# Altium PCB MEMS_V3_PCB.PcbDoc
Units mm, origin at the board's own origin, x right, y up, seen from the top; angles counter-clockwise.
Board outline 40.4 x 45.06 mm, 2 copper layers (Top Layer, Bottom Layer), stack 0.695 mm thick; 29 components, 20 nets, 79 pads, 342 vias.
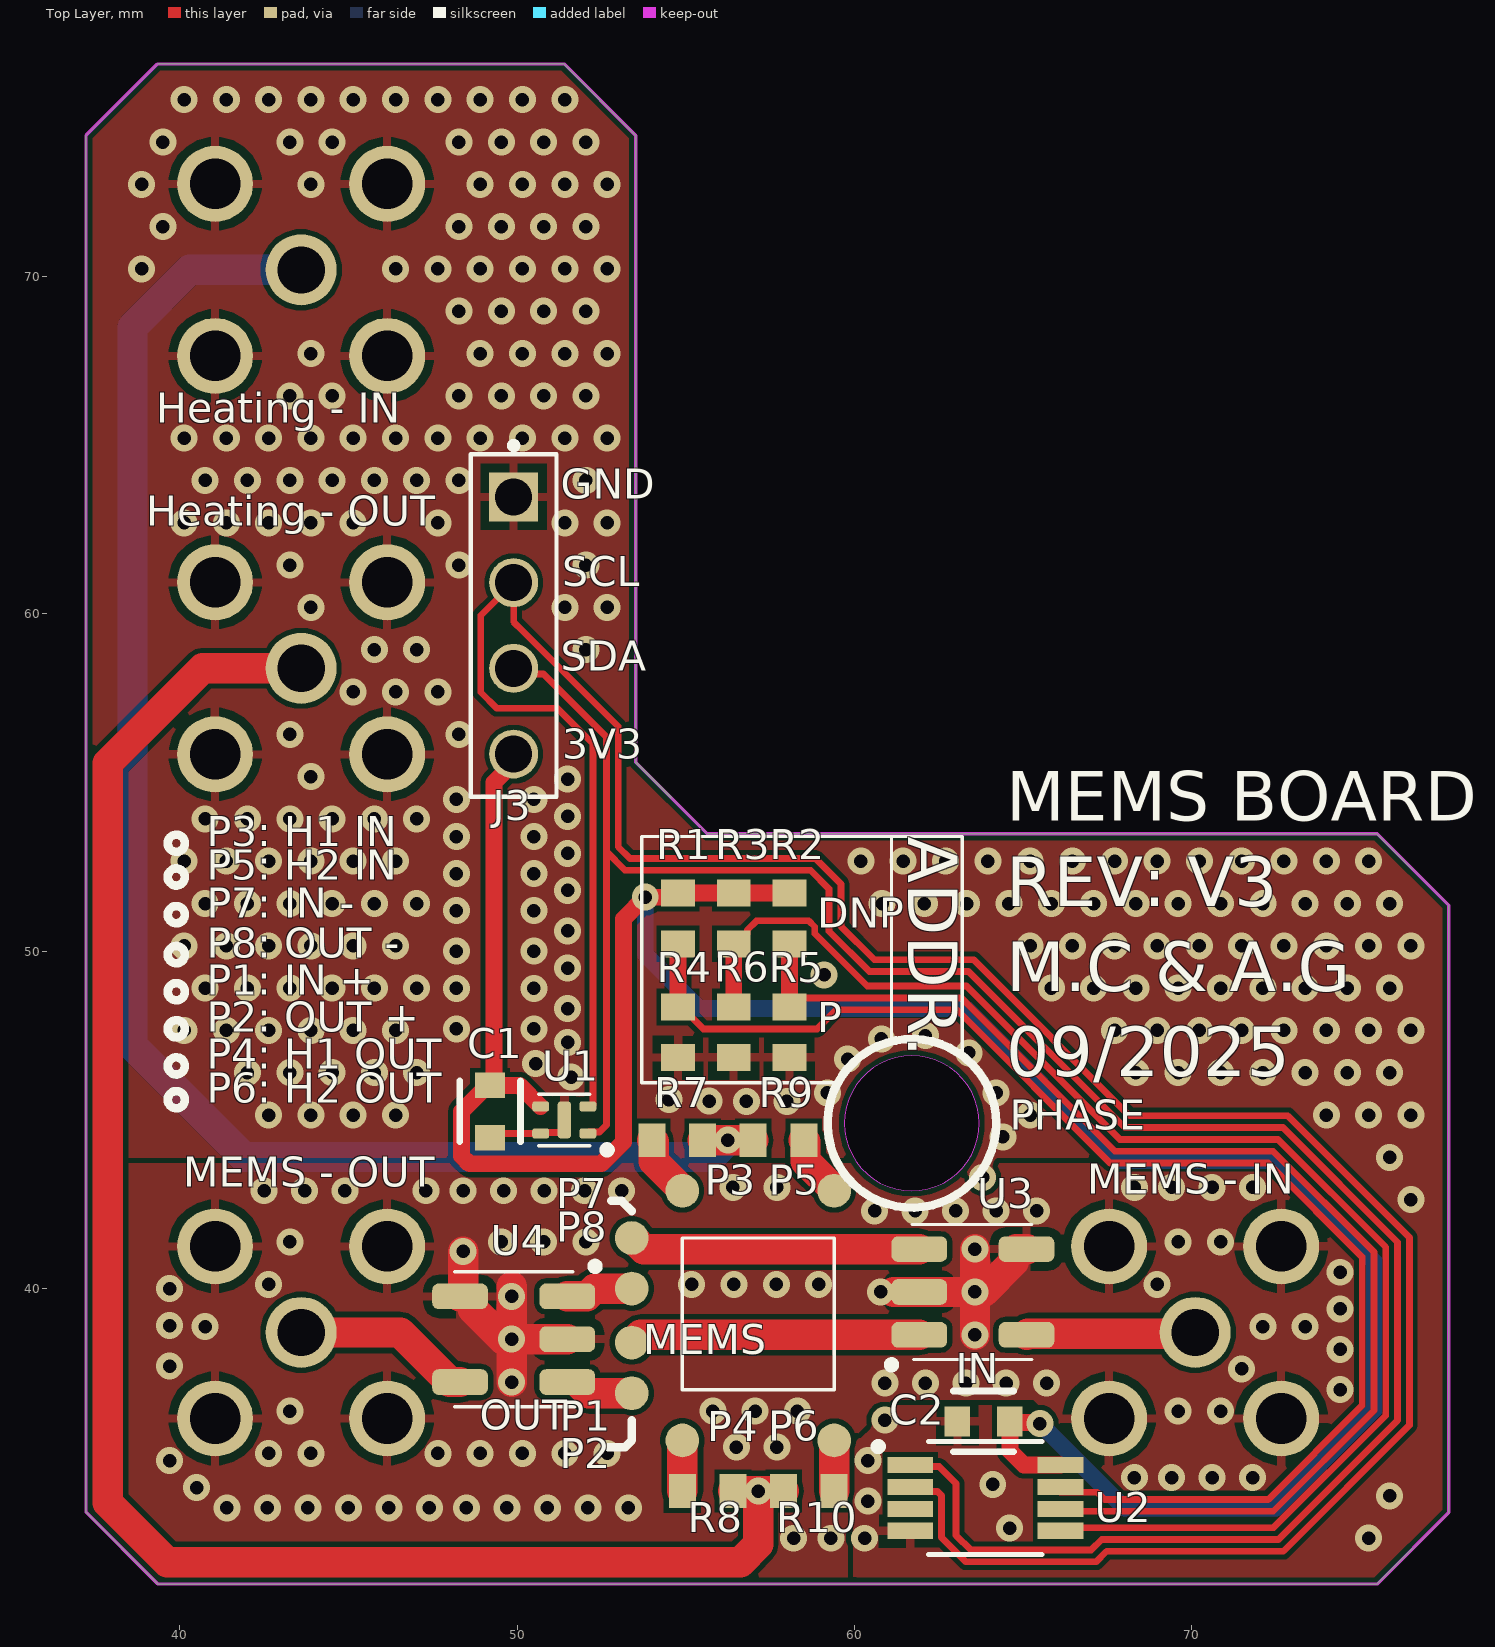
[diagram p0: Top Layer view]
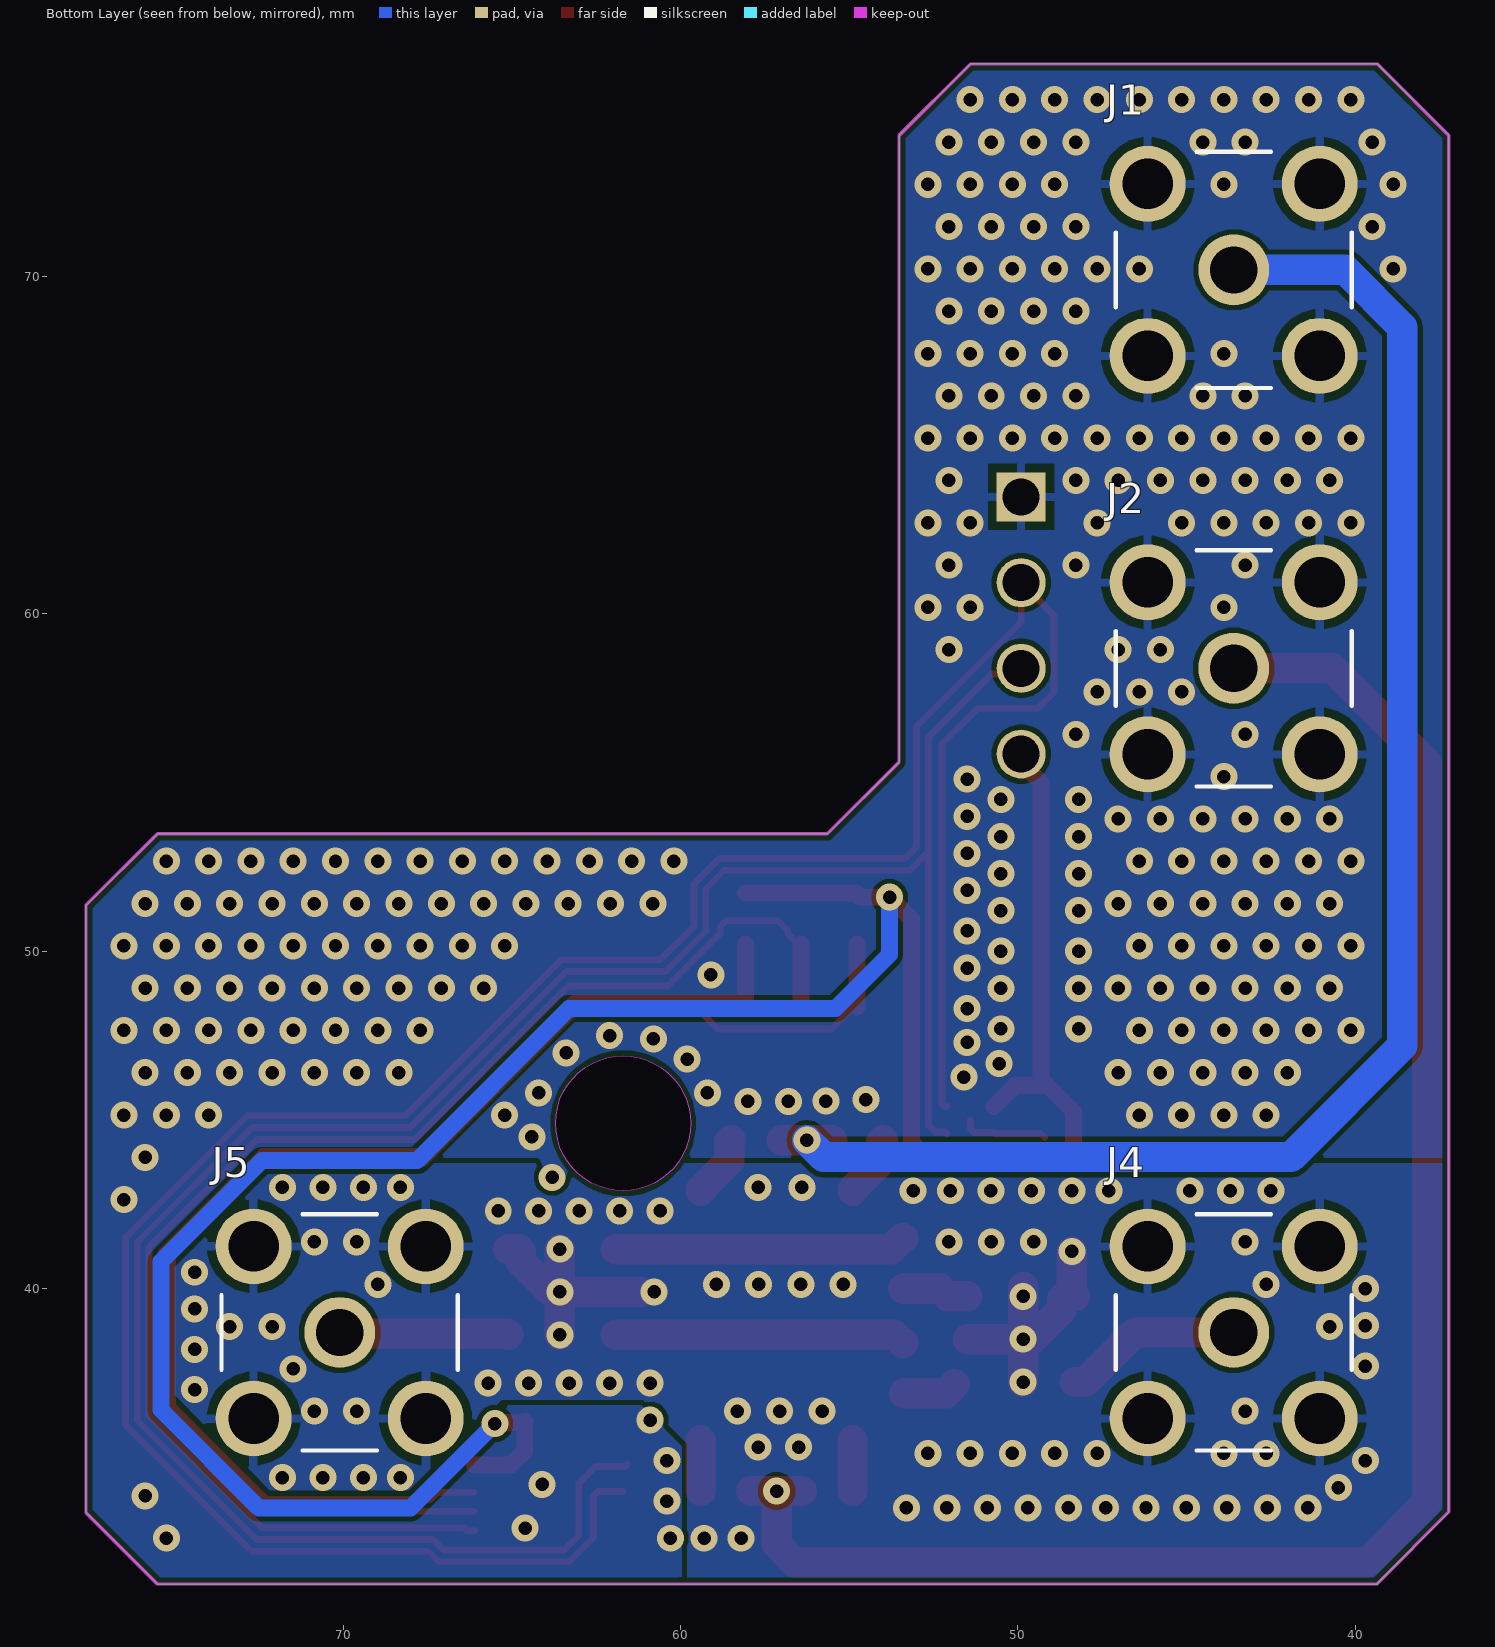
[diagram p1: Bottom Layer view, seen from below]
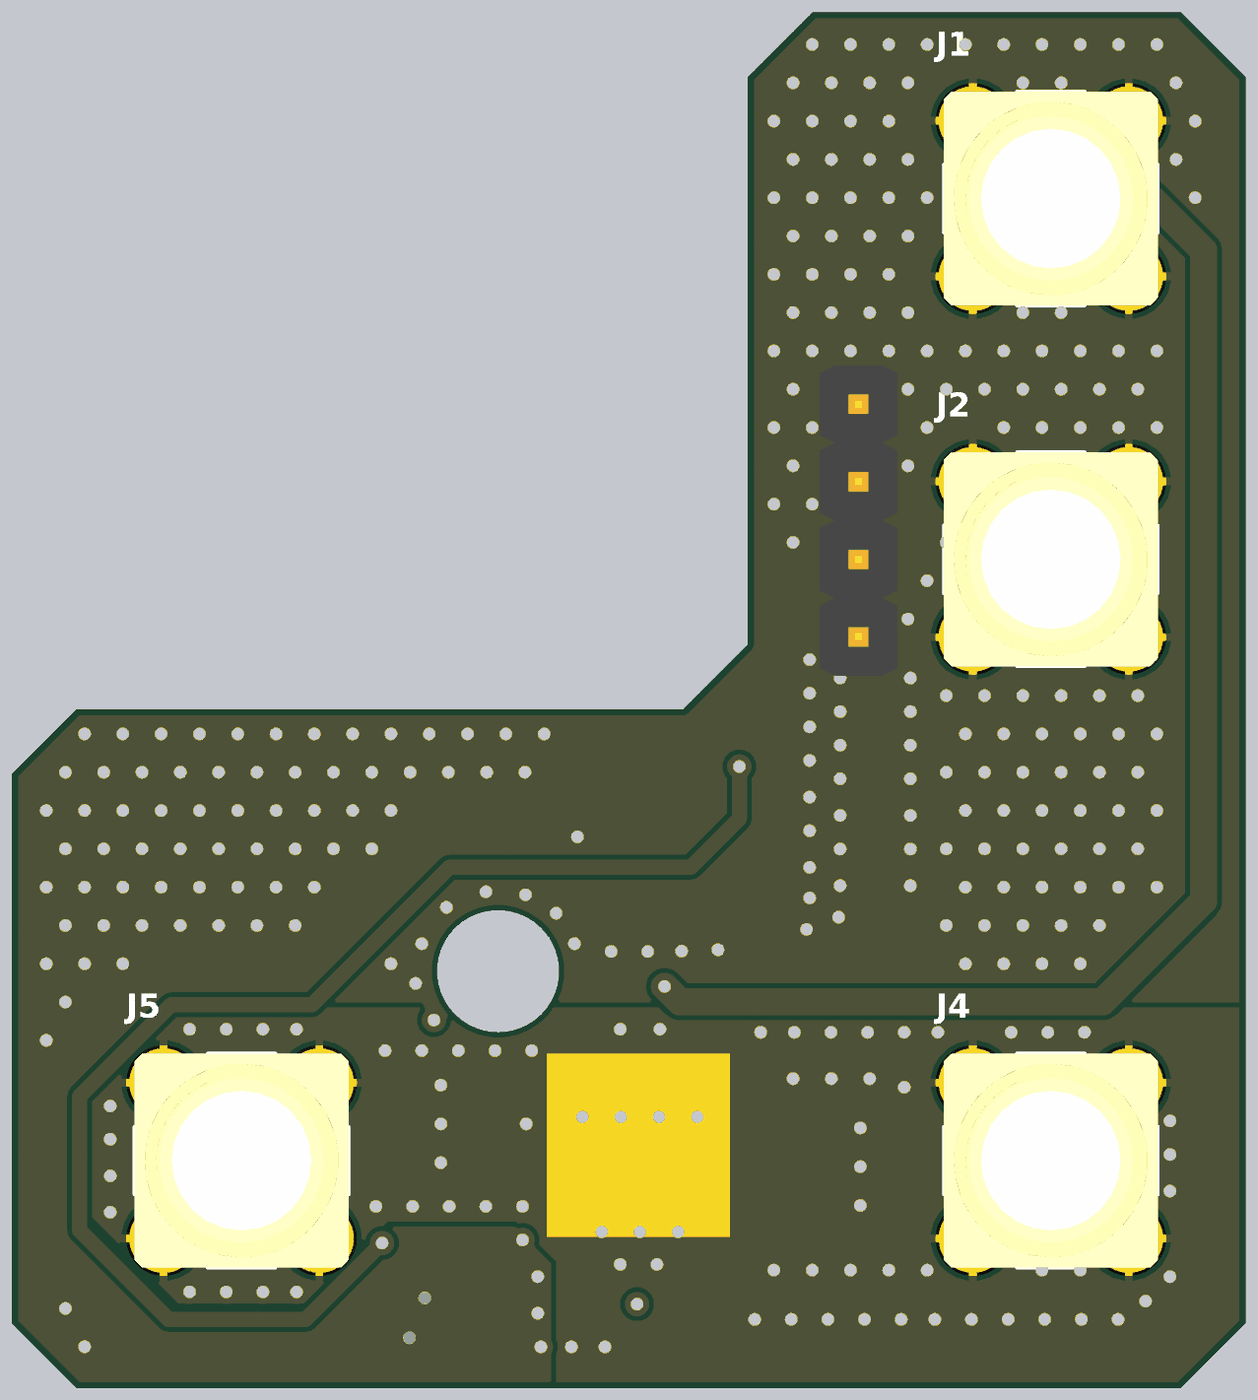
[diagram p2: 3D render of the assembled board from below, using the file's embedded part models]

## Layer stack, top to bottom
Top Solder: solder mask 0.0102, Solder Resist, Dk 3.5
Top Layer: signal copper 0.0152
Dielectric 1: dielectric 0.665, FR-4, Dk 4.8
Bottom Layer: signal copper 0.0152
Bottom Solder: solder mask 0.0102, Solder Resist, Dk 3.5

## Board outline
37.221,33.379 37.221,74.179 39.343,76.3 51.4,76.3 53.521,74.179 53.521,55.6 55.643,53.479 75.5,53.479 77.621,51.357 77.621,33.363 75.5,31.242 39.343,31.242 39.343,31.258
cut-out: 59.7,44.9 ccw(c61.7,44.9) 61.7,42.9 ccw(c61.7,44.9) 63.7,44.9 ccw(c61.7,44.9) 61.7,46.9 ccw(c61.7,44.9)

## Design rules (kind name [scope] priority, off if disabled: settings)
Clearance [All] p1: gap=0.15 ignorepadtopadclearanceinfootprint=FALSE
MinimumSolderMaskSliver [All] p1 off: minsoldermaskwidth=0.254
PolygonConnect [All] p1: thpad.connectstyle=Relief thpad.reliefconductorwidth=0.254 thpad.reliefentries=4 thpad.polygonreliefangle="90 Angle" thpad.airgapwidth=0.254 smdpad.connectstyle=Relief smdpad.reliefconductorwidth=0.254 smdpad.reliefentries=4 smdpad.polygonreliefangle="90 Angle" smdpad.airgapwidth=0.254 via.connectstyle=Direct via.reliefconductorwidth=0.254 via.reliefentries=4 via.polygonreliefangle="90 Angle" via.airgapwidth=0.254
RoutingVias [All] p1: holewidth=0.3 width=0.6 viastyle="Through Hole" minholewidth=0.2 minwidth=0.5 maxholewidth=0.711 maxwidth=1.27
SilkToSilkClearance [All] p1 off: silktosilkclearance=0.254
SilkToSolderMaskClearance [IsPad] p1 off: minsilkscreentomaskgap=0.254 clearancetoexposedcopper=TRUE
SolderMaskExpansion [All] p1: expansion=0.102 istentingtop=FALSE
SupplyNets "Schematic Supply Nets_1" [InNet('AGND')] p1: voltage=0.000
SupplyNets "Schematic Supply Nets_2" [InNet('GND')] p2: voltage=0.000
SupplyNets "Schematic Supply Nets" [InNet('3V3')] p3: voltage=0.000
Width [(InNet('MEMS_IN') OR InNet('MEMS_OUT') OR InNet('MEMS_IN_D_N') OR InNet('MEMS_IN_D_P') OR InNet('MEMS_OUT_D_N') OR InNet('MEMS_OUT_D_P'))] p1: maxlimit=1.154 minlimit=0.9 preferedwidth=1.154 impedanceprofiledriven=TRUE impedanceprofileid={71C03835-4AAD-4EFE-88B4-1C130F7F27B0} impedanceprofilevalue=50.000000 minimp=50.000000 maximp=50.000000 favimp=50.000000
Width Width_1 [All] p2: maxlimit=1 minlimit=0.1 preferedwidth=0.2
27 further rules are at their usual default settings.

## Components (designator, comment, footprint, x,y, rotation, side; value= is the part's Value field where it differs from the comment)
C1 "CL10E104KC8VPNC" C0603 49.2,45.25 r270 top value=100nF
C2 "CL10E104KC8VPNC" C0603 63.826,36.061 r180 top value=100nF
J1 "CONSMA001-G" CONSMA001-G 43.6,70.196 r180 bottom locked
J2 "CONSMA001-G" CONSMA001-G 43.6,58.385 r180 bottom locked
J3 "61300411121" WURTH_61300411121 49.9,59.655 r270 top
J4 "CONSMA001-G" CONSMA001-G 43.6,38.7 r180 bottom locked
J5 "CONSMA001-G" CONSMA001-G 70.1,38.7 r180 bottom locked
P1 "MEMS_PAD" MEMS_PAD 53.4,38.4 r0 top
P2 "MEMS_PAD" MEMS_PAD 53.4,36.9 r0 top
P3 "MEMS_PAD" MEMS_PAD 54.9,42.9 r0 top
P4 "MEMS_PAD" MEMS_PAD 54.9,35.5 r0 top
P5 "MEMS_PAD" MEMS_PAD 59.4,42.9 r0 top
P6 "MEMS_PAD" MEMS_PAD 59.4,35.5 r0 top
P7 "MEMS_PAD" MEMS_PAD 53.4,41.5 r0 top
P8 "MEMS_PAD" MEMS_PAD 53.4,40 r0 top
R1 "RMCF0603ZT0R00" R0603 54.771,50.971 r90 top value=0R
R2 "RMCF0603ZT0R00" R0603 58.073,50.971 r90 top value=0R
R3 "RMCF0603ZT0R00" R0603 56.422,50.971 r90 top value=0R
R4 "RMCF0603ZT0R00" R0603 54.771,47.596 r90 top value=0R
R5 "RMCF0603ZT0R00" R0603 58.073,47.596 r90 top value=0R
R6 "RMCF0603ZT0R00" R0603 56.422,47.596 r90 top value=0R
R7 "RMCF0603ZT0R00" R0603 54.75,44.4 r180 top value=0R
R8 "RMCF0603ZT0R00" R0603 55.65,34 r180 top value=0R
R9 "RMCF0603ZT0R00" R0603 57.75,44.4 r0 top value=0R
R10 "RMCF0603ZT0R00" R0603 58.65,34 r0 top value=0R
U1 "STS4L-AD1B-R3" STS4L-AD1B-R3 51.4,45 r180 top
U2 "P3T1755DPZ" TSSOP8_P3T1755DPZ_NXP 63.879,33.794 r0 top
U3 "TC1-1-13MX+" TC1-1-13MX+ 63.513,39.9 r90 top
U4 "TC1-1-13MX+" TC1-1-13MX+ 49.9,38.5 r270 top

## Footprints (in the part's own frame and the unit in brackets; to place one, negate y for a bottom-side part, rotate by r counter-clockwise, add the part's x,y. Pads: shape width x height; smd on the part's side, far side on the other; paste and mask are expansions set on the pad)
C0603 [mm]
  rect 0.75x0.9 smd paste+0 mask+0: 1(-0.775,0) 2(0.775,0)
  silkscreen extent -0.9,-0.9 0.9,0.9, body extent -1.25,-0.6 1.25,0.6, height 0.25
CONSMA001-G [mm]
  round 2.1 hole 1.4: 1(0,0)
  round 2.25 hole 1.5: S1(-2.55,2.55) S2(-2.55,-2.55) S3(2.55,-2.55) S4(2.55,2.55)
  silkscreen extent -3.5,-3.5 3.5,3.5, body extent -3.51,-3.51 3.51,3.51, height 9.78
MEMS_PAD [mm]
  round 1 smd: 1(0,0)
R0603 [mm]
  rect 0.8x1 smd: 1(-0.75,0) 2(0.75,0)
  body extent -0.85,-0.45 0.85,0.45, height 0.55
STS4L-AD1B-R3 [mm]
  rrect50% 0.5x0.3 smd: 1(-0.7,0.4) 2(-0.7,-0.4) 3(0.7,-0.4) 4(0.7,0.4)
  rrect50% 0.4x1.1 smd: THERM(0,0)
  silkscreen extent -1.37,-0.76 0.76,0.99, body extent -0.75,-0.75 0.75,0.75, height 0.55
TC1-1-13MX+ [mm]
  rrect50% 0.76x1.65 smd: 1(-1.27,1.59) 2(0,1.59) 3(1.27,1.59) 4(-1.27,-1.59) 6(1.27,-1.59)
  silkscreen extent -2.26,-1.75 2,2.51, body extent -1.95,-1.91 1.91,1.94, height 4.06
TSSOP8_P3T1755DPZ_NXP [mm]
  rect 1.356x0.483 smd paste+0 mask+0: 1(-2.228,0.975) 2(-2.228,0.325) 3(-2.228,-0.325) 4(-2.228,-0.975) 5(2.228,-0.975) 6(2.228,-0.325) 7(2.228,0.325) 8(2.228,0.975)
  silkscreen extent -3.27,-1.68 1.68,1.68, body extent -2.55,-1.55 2.55,1.55, height 1.09
WURTH_61300411121 [mm]
  rect 1.45x1.45 / inner round 1.45 / far side rect 1.45x1.45 hole 1.1: 1(-3.81,0)
  round 1.45 hole 1.1: 2(-1.27,0) 3(1.27,0) 4(3.81,0)
  silkscreen extent -5.43,-1.27 5.08,1.27, body extent -5.08,-1.27 5.08,1.27, height 7.27

## Part data
C1 C2: "CAP CER 100NF 100V X8L 0603", Case=0603, Manufacturer=Samsung, Supplier Part Number=1276-CL10E104KC8VPNCCT-ND, Supplier Part Number 1=187-CL10E104KC8VPNC, Manufacturer Part Number=CL10E104KC8VPNC, Pricing="1=0.27, 10=0.155, 50=0.1104, 100=0.0966, 500=0.07306, 1000=0.06573 (USD)", RoHS=No, Stock=47712, Supplier=Digikey, Supplier 1=Mouser
J1 J2 J4 J5: "CONN SMA RCPT STR 50 OHM PCB"
J3: "CONN HEADER VERT 4POS 2.54MM", Package=None, Supplier Part Number 1=20X0951, Check_prices=https://www.snapeda.com/parts/61300411121/W%25C3%25BCrth+Elektronik+Midcom/view-part/?ref=eda, MF="WÃ¼rth Elektronik", MP=61300411121, SnapEDA_Link=https://www.snapeda.com/parts/61300411121/W%25C3%25BCrth+Elektronik+Midcom/view-part/?ref=snap, Supplier 1=Newark
P1 P2 P3 P4 P5 P6 P7 P8: "PAD MEMS connection"
R1 R2 R3 R4 R5 R6: "RES 0 OHM JUMPER 1/10W 0603", Package=0603, Supplier Part Number 1=RMCF0603ZT0R00CT-ND, Check_prices=https://www.snapeda.com/parts/RMCF0603ZT0R00/Stackpole+Electronics+Inc/view-part/?ref=eda, MF="Stackpole Electronics", MP=RMCF0603ZT0R00, SnapEDA_Link=https://www.snapeda.com/parts/RMCF0603ZT0R00/Stackpole+Electronics+Inc/view-part/?ref=snap, Supplier 1=DigiKey
R7 R8 R9 R10: library part RMCF0603ZT0R00_1, "RES 0 OHM JUMPER 1/10W 0603", Package=0603, Supplier Part Number 1=RMCF0603ZT0R00CT-ND, Check_prices=https://www.snapeda.com/parts/RMCF0603ZT0R00/Stackpole+Electronics+Inc/view-part/?ref=eda, MF="Stackpole Electronics", MP=RMCF0603ZT0R00, SnapEDA_Link=https://www.snapeda.com/parts/RMCF0603ZT0R00/Stackpole+Electronics+Inc/view-part/?ref=snap, Supplier 1=DigiKey
U1: "IC - TEMPERATURE SENSOR 4-DFN", Supplier Part Number 1=1649-STS4L-AD1B-R3CT-ND, Supplier 1=DigiKey
U2: "SENSOR DGTL -40C ~ 125C 8-TSSOP", Supplier Part Number 1=568-P3T1755DPZCT-ND, Supplier 1=DigiKey
U3 U4: "1:1 CORE & WIRE TRANSFORMER, 4.5"

## Via types
v1: diameter 0.8, hole 0.4, Top Layer to Bottom Layer, tented both sides, 342 vias

## Nets (pads, with @x,y where several pads share a name; then routed paths per layer and width w, separated by ;. In a path a pad name is that pad's centre, name@x,y a point inside that pad or via, vN(x,y) a via of type N, cw(c..) or ccw(c..) an arc to the next point about the centre after c; other vN are vias at no path point)
3V3: C1.1 C2.1 J3.4 R1.2 R2.2 R3.2 U1.3 U2.8 | length 78.4
  Top Layer w0.5: J3.4 49.9,55.588 49.314,55.002 49.314,46.139 C1.1 ; 50.469,43.7 48.584,43.7 48.35,43.934 48.35,45.25 49.125,46.025 C1.1 ; 50.469,43.7 52.5,43.7 53.15,44.35 53.15,50.95 v1(53.8,51.6) 54.671,51.6 54.792,51.721 R2.2 ; U1.3 50.08,46.02 49.205,46.02 C1.1 ; C2.1 64.613,36.05 64.613,35.187 65.031,34.769 U2.8 ; C2.1@64.632,36.031 65.469,36.031 v1(65.5,36)
  Bottom Layer w0.5: v1(53.8,51.6) 53.8,49.9 55.4,48.3 63.3,48.3 67.8,43.8 72.4,43.8 75.4,40.8 75.4,36.4 72.5,33.5 68,33.5 v1@65.513,35.987
AGND: J4.S1 J4.S2 J4.S3 J4.S4 J5.S1 J5.S2 J5.S3 J5.S4 U3.2 U3.6 U4.2 U4.4 | length 15
  Top Layer w0.9: U4.4@48.305,39.775 U4.4 48.33,39.77 48.4,39.84 v1(48.4,41.1) ; U4.4@48.615,39.77 48.685,39.7 48.685,39.395 49.58,38.5 v1(49.839,38.5) ; v1(49.839,37.23) v1(49.839,38.5) ; v1@49.839,40.061 v1(49.839,39.77) v1(49.839,38.5) ; U4.2 v1(49.839,38.5) ; U3.2@61.161,39.9 U3.2 v1(63.574,39.9) ; v1(63.574,38.63) v1(63.574,39.9) ; v1(63.574,41.17) v1(63.574,39.9) ; U3.6@65.108,41.175 U3.6 64.798,41.17 64.728,41.1 64.728,40.795 63.833,39.9 v1(63.574,39.9)
  other v1: 58.2,32.6 59.3,32.6 41.4,33.5 42.6,33.5 43.8,33.5 45,33.5 46.2,33.5 47.4,33.5 48.5,33.5 49.7,33.5 50.9,33.5 52.1,33.5 53.3,33.5 40.5,34.1 68.3,34.4 69.4,34.4 70.6,34.4 71.8,34.4 39.7,34.9 42.636,35.112 43.89,35.112 47.652,35.112 48.906,35.112 50.16,35.112 51.414,35.112 52.668,35.112 56.5,35.3 57.7,35.3 43.263,36.366 55.803,36.366 57.057,36.366 58.311,36.366 69.597,36.366 70.851,36.366 74.4,37.009 60.9,37.2 62.1,37.2 63.3,37.2 64.5,37.2 65.7,37.2 71.478,37.62 39.7,37.7 74.4,38.2 40.755,38.874 72.105,38.874 73.359,38.874 39.7,38.9 74.4,39.4 60.78,39.9 39.7,40 42.636,40.128 55.176,40.128 56.43,40.128 57.684,40.128 58.938,40.128 68.97,40.128 74.4,40.484 43.263,41.382 49.533,41.382 50.787,41.382 52.041,41.382 69.597,41.382 70.851,41.382 60.6,42.3 61.8,42.3 63,42.3 64.2,42.3 65.4,42.3 42.5,42.9 43.7,42.9 44.9,42.9 47.3,42.9 48.4,42.9 49.6,42.9 50.8,42.9 52,42.9 53.1,42.9 56.4,43 57.7,43 68.3,43 69.4,43 70.6,43 71.8,43
GND: C1.2 C2.2 J1.S1 J1.S2 J1.S3 J1.S4 J2.S1 J2.S2 J2.S3 J2.S4 J3.1 R4.1 R5.1 R6.1 U1.4 U1.THERM U2.4 | length 2.6
  Top Layer w0.2: C1.2 49.325,44.6 U1.4 50.725,44.625 51.3,44.625 51.4,44.725 U1.THERM
  other v1: 60.3,32.6 75.24,32.604 64.6,32.9 60.4,33.7 75.867,33.858 64.1,34.2 60.4,34.9 60.9,36.1 76.494,42.636 63.8,43.3 75.867,43.89 64.4,44.5 42.636,45.144 43.89,45.144 45.144,45.144 46.398,45.144 65.208,45.144 73.986,45.144 75.24,45.144 76.494,45.144 56.8,45.546 58,45.546 55.692,45.558 54.5,45.6 59.2,45.8 64.2,45.8 51.6,46.27 42.009,46.398 43.263,46.398 44.517,46.398 45.771,46.398 47.025,46.398 68.343,46.398 69.597,46.398 70.851,46.398 72.105,46.398 73.359,46.398 74.613,46.398 75.867,46.398 50.551,46.668 59.8,46.8 63.39,46.99 51.5,47.3 60.8,47.4 62.1,47.5 40.128,47.652 41.382,47.652 42.636,47.652 43.89,47.652 45.144,47.652 46.398,47.652 67.716,47.652 68.97,47.652 70.224,47.652 71.478,47.652 72.732,47.652 73.986,47.652 75.24,47.652 76.494,47.652 48.2,47.7 50.5,47.7 51.5,48.3 40.755,48.906 42.009,48.906 43.263,48.906 44.517,48.906 45.771,48.906 47.025,48.906 48.2,48.9 50.5,48.9 65.835,48.906 67.089,48.906 68.343,48.906 69.597,48.906 70.851,48.906 72.105,48.906 73.359,48.906 74.613,48.906 75.867,48.906 59.1,49.3 51.5,49.5 48.2,50 50.5,50 40.128,50.16 41.382,50.16 42.636,50.16 43.89,50.16 45.144,50.16 46.398,50.16 65.208,50.16 66.462,50.16 67.716,50.16 68.97,50.16 70.224,50.16 71.478,50.16 72.732,50.16 73.986,50.16 75.24,50.16 76.494,50.16 51.5,50.6 48.2,51.2 50.5,51.2 40.755,51.414 42.009,51.414 43.263,51.414 44.517,51.414 45.771,51.414 47.025,51.414 60.819,51.414 62.073,51.414 63.327,51.414 64.581,51.414 65.835,51.414 67.089,51.414 68.343,51.414 69.597,51.414 70.851,51.414 72.105,51.414 73.359,51.414 74.613,51.414 75.867,51.414 51.5,51.8 48.2,52.3 50.5,52.3 40.128,52.668 41.382,52.668 42.636,52.668 43.89,52.668 45.144,52.668 46.398,52.668 60.192,52.668 61.446,52.668 62.7,52.668 63.954,52.668 65.208,52.668 66.462,52.668 67.716,52.668 68.97,52.668 70.224,52.668 71.478,52.668 72.732,52.668 73.986,52.668 75.24,52.668 51.5,52.9 48.2,53.4 50.5,53.4 40.755,53.922 42.009,53.922 43.263,53.922 44.517,53.922 45.771,53.922 47.025,53.922 51.5,54 48.2,54.5 50.5,54.5 51.5,55.1 43.89,55.176 43.263,56.43 48.279,56.43 45.144,57.684 46.398,57.684 47.652,57.684 45.771,58.938 47.025,58.938 52.041,58.938 43.89,60.192 51.414,60.192 52.668,60.192 43.263,61.446 48.279,61.446 52.041,61.446 40.128,62.7 41.382,62.7 42.636,62.7 43.89,62.7 45.144,62.7 47.652,62.7 51.414,62.7 52.668,62.7 40.755,63.954 42.009,63.954 43.263,63.954 44.517,63.954 45.771,63.954 47.025,63.954 48.279,63.954 52.041,63.954 40.128,65.208 41.382,65.208 42.636,65.208 43.89,65.208 45.144,65.208 46.398,65.208 47.652,65.208 48.906,65.208 50.16,65.208 51.414,65.208 52.668,65.208 43.263,66.462 44.517,66.462 48.279,66.462 49.533,66.462 50.787,66.462 52.041,66.462 43.89,67.716 48.906,67.716 50.16,67.716 51.414,67.716 52.668,67.716 48.279,68.97 49.533,68.97 50.787,68.97 52.041,68.97 38.874,70.224 46.398,70.224 47.652,70.224 48.906,70.224 50.16,70.224 51.414,70.224 52.668,70.224 39.501,71.478 48.279,71.478 49.533,71.478 50.787,71.478 52.041,71.478 38.874,72.732 43.89,72.732 48.906,72.732 50.16,72.732 51.414,72.732 52.668,72.732 39.501,73.986 43.263,73.986 44.517,73.986 48.279,73.986 49.533,73.986 50.787,73.986 52.041,73.986 40.128,75.24 41.382,75.24 42.636,75.24 43.89,75.24 45.144,75.24 46.398,75.24 47.652,75.24 48.906,75.24 50.16,75.24 51.414,75.24
HEATING_IN: J1.1 R7.1 R9.1 | length 47.7
  Top Layer w0.9: R7.1 v1(56.25,44.4) R9.1
  Bottom Layer w0.9: J1.1 40.296,70.196 38.6,68.5 38.6,47.2 41.9,43.9 55.75,43.9 v1(56.25,44.4)
HEATING_IN_1: P3.1 R7.2 | length 1.9
  Top Layer w0.9: R7.2 54.05,44.35 54.05,43.777 54.9,42.927 P3.1
HEATING_IN_2: P5.1 R9.2 | length 1.9
  Top Layer w0.9: R9.2 58.55,44.35 58.55,43.777 59.4,42.927 P5.1
HEATING_OUT: J2.1 R8.1 R10.1 | length 52.1
  Top Layer w0.9: J2.1 40.685,58.385 37.871,55.571 37.871,33.648 39.628,31.892 56.623,31.892 57.15,32.419 v1(57.15,34) ; R8.1 v1(57.15,34) ; R10.1 v1(57.15,34)
HEATING_OUT_1: P4.1 R8.2 | length 1.5
  Top Layer w0.9: R8.2 P4.1
HEATING_OUT_2: P6.1 R10.2 | length 1.5
  Top Layer w0.9: R10.2 P6.1
MEMS_IN: J5.1 U3.4 | length 5
  Top Layer w0.9: U3.4 65.138,38.665 70.065,38.665 J5.1
MEMS_IN_D_N: P7.1 U3.3 | length 8.7
  Top Layer w0.9: P7.1 53.427,41.5 53.757,41.17 U3.3
MEMS_IN_D_P: P1.1 U3.1 | length 8.6
  Top Layer w0.9: P1.1 53.427,38.4 53.657,38.63 U3.1
MEMS_OUT: J4.1 U4.6 | length 5.3
  Top Layer w0.9: J4.1 46.535,38.7 48.005,37.23 U4.6
MEMS_OUT_D_N: P8.1 U4.1 | length 2
  Top Layer w0.9: U4.1 52.07,39.77 52.3,40 P8.1
MEMS_OUT_D_P: P2.1 U4.3 | length 1.6
  Top Layer w0.9: U4.3@51.865,37.16 52.125,36.9 P2.1@53.373,36.9
NetR1_1: R1.1 R4.2 U2.7 | length 40.3
  Top Layer w0.2: R4.2 54.871,48.346 55.521,47.696 58.896,47.696 59.467,48.267 63.033,48.267 67.578,43.722 72.266,43.722 75.05,40.938 75.05,36.531 72.269,33.75 67.41,33.75 67.201,33.96 U2.7@66.108,33.96
  Top Layer w0.5: R4.2 R1.1
NetR2_1: R2.1 R5.2 U2.6 | length 37.6
  Top Layer w0.2: R5.2 58.344,48.617 63.178,48.617 67.723,44.072 72.411,44.072 75.4,41.083 75.4,36.386 72.414,33.4 U2.6@66.122,33.4
  Top Layer w0.5: R5.2 R2.1
NetR3_1: R3.1 R6.2 U2.5 | length 41.7
  Top Layer w0.2: R3.1 56.522,50.221 56.822,50.521 56.822,50.621 57.101,50.9 58.648,50.9 58.823,50.725 58.823,50.525 60.381,48.967 63.323,48.967 67.868,44.422 72.556,44.422 75.75,41.228 75.75,36.241 72.423,32.913 66.413,32.913 66.319,32.819 U2.5
  Top Layer w0.5: R6.2 R3.1
SCL: J3.2 U1.2 U2.2 | length 80.2
  Top Layer w0.2: U1.2 52.2,45.4 52.25,45.45 52.25,56.15 51.2,57.2 49.4,57.2 48.925,57.675 48.925,59.95 J3.2 49.9,59.764 50.164,59.5 53,56.664 53,53.095 53.345,52.75 58.845,52.75 59.6,51.995 59.6,50.738 60.588,49.75 63.53,49.75 68.158,45.122 72.846,45.122 76.45,41.518 76.45,35.951 72.713,32.213 67.476,32.213 67.162,31.9 63.305,31.9 62.58,32.625 62.58,33.869 62.463,33.986 U2.2@61.704,33.986
SDA: J3.3 U1.1 U2.1 | length 68.1
  Top Layer w0.2: J3.3 50.067,58.218 50.782,58.218 52.65,56.35 52.65,52.95 ; U1.1 52.14,44.64 52.44,44.64 52.65,44.85 52.65,52.95 ; U2.1@61.575,34.8 61.648,34.727 62.513,34.727 63.014,34.226 63.014,32.686 63.45,32.25 67.017,32.25 67.331,32.563 72.568,32.563 76.1,36.096 76.1,41.373 72.701,44.772 68.013,44.772 63.385,49.4 60.443,49.4 59.25,50.593 59.25,51.85 58.7,52.4 53.2,52.4 52.65,52.95
pads on no net: U2.3

## Polygon pours and split planes (outlines as drawn)
no net on Bottom Solder "NONET_L-01_P-001" (solid): 54.1,36.2 54.1,42.2 60.1,42.2 60.1,36.2
GND on Bottom Layer "GND_L02_P006" (solid, remove dead copper, pour order 6): 20.043,77 90.043,77 90.043,25.184 20.043,25.184
AGND on Bottom Layer "NONET_L-01_P-001" (solid, remove dead copper, pour order 1): 35.971,42.657 35.971,33.132 38.384,30.719 59.263,30.719 59.8,31.256 59.8,35.4 61.1,36.7 65.3,36.7 67.979,34.021 72.166,34.021 75.05,36.905 75.05,40.938 72.266,43.722 37.036,43.722
AGND on Top Layer "NONET_L-01_P-001" (solid, remove dead copper, pour order 4): 35.971,42.657 35.971,33.132 38.384,30.719 59.263,30.719 59.8,31.256 59.8,35.4 61.1,36.7 65.3,36.7 67.979,34.021 72.166,34.021 75.05,36.905 75.05,40.938 72.266,43.722 37.036,43.722
GND on Top Layer "GND_L01_P007" (solid, remove dead copper, pour order 7): 20.043,78.4 90.043,78.4 90.043,25.184 20.043,25.184

## Keep-outs
Keep-Out Layer:
  lines w0.1: 39.343,31.242 75.5,31.242 77.621,33.363 77.621,51.357 75.5,53.479 55.643,53.479 53.521,55.6 53.521,74.179 51.4,76.3 39.343,76.3 37.221,74.179 37.221,33.379 39.343,31.258

## Silkscreen, mask and mechanical layers (free items; w line width, h text height)
Top Overlay:
  circle w0.254: c39.9,46.6 r0.254
  circle w0.254: c39.9,45.6 r0.254
  circle w0.254: c39.9,52.2 r0.254
  circle w0.254: c39.9,53.2 r0.254
  circle w0.254: c39.9,47.7 r0.254
  circle w0.254: c39.9,48.8 r0.254
  circle w0.254: c39.9,49.9 r0.254
  circle w0.254: c39.9,51.085 r0.254
  circle w0.254: c61.7,44.9 r2.5
  lines w0.1: 59.5,46.1 53.7,46.1 53.7,53.4 61.1,53.4 ; 61.1,47.3 61.1,53.4 ; 63.2,46.9 63.2,53.4 61.1,53.4 ; 54.9,37 59.4,37 59.4,41.5 54.9,41.5 54.9,37
  lines w0.254: 52.7,35.3 53.2,35.3 53.4,35.5 53.4,36.1 ; 52.8,42.6 53.1,42.6 53.4,42.3
  text "Heating - IN" at 39.3,65.367 h1.52
  text "GND" at 51.3,63.115 h1.52
  text "Heating - OUT" at 39.008,62.319 h1.52
  text "SCL" at 51.339,60.515 h1.52
  text "SDA" at 51.301,58.015 h1.52
  text "3V3" at 51.346,55.413 h1.52
  text "ADDR." at 61.1,53.4 h2.52 r270
  text "P3: H1 IN" at 40.8,52.815 h1.52
  text "P5: H2 IN" at 40.8,51.815 h1.52
  text "P7: IN -" at 40.8,50.7 h1.52
  text "DNP" at 58.9,50.4 h1.52
  text "P8: OUT -" at 40.8,49.515 h1.52
  text "P1: IN +" at 40.8,48.415 h1.52
  text "P2: OUT +" at 40.8,47.315 h1.52
  text "P" at 58.9,47.3 h1.52
  text "P4: H1 OUT" at 40.8,46.215 h1.52
  text "MEMS BOARD / REV: V3 / M.C & A.G / 09/2025" at 64.5,45.8 h2.52
  text "P6: H2 OUT" at 40.8,45.215 h1.52
  text "PHASE" at 64.6,44.414 h1.52
  text "MEMS - OUT" at 40.1,42.715 h1.52
  text "MEMS - IN" at 66.9,42.515 h1.52
  text "MEMS" at 53.735,37.763 h1.52
  text "IN" at 63,36.9 h1.52
  text "OUT" at 48.9,35.514 h1.52
Mechanical 1:
  circle w0.254: c61.7,44.9 r2
  lines w0.1: 54.131,39.21 60.131,39.21 ; 57.131,36.21 57.131,42.21 ; 54.131,36.21 60.131,36.21 60.131,42.21 54.131,42.21 54.131,36.21 ; 54.873,36.966 59.373,36.966 59.373,41.466 54.873,41.466 54.873,36.966 ; 59.2,43.7 59.2,48.5 62.7,48.5 62.7,43.7 59.2,43.7
  lines w0.254: 43.6,38.7 70.1,38.7